# Altium PCB Plate_A.PcbDoc
Units mm, origin at the board's own origin, x right, y up, seen from the top; angles counter-clockwise.
Board outline 100 x 100 mm, 2 copper layers (Top Layer, Bottom Layer), stack 0.97 mm thick; 6 components, 2 nets, 10 pads, 0 vias.
Unrouted connection lines stored in the file: 2.
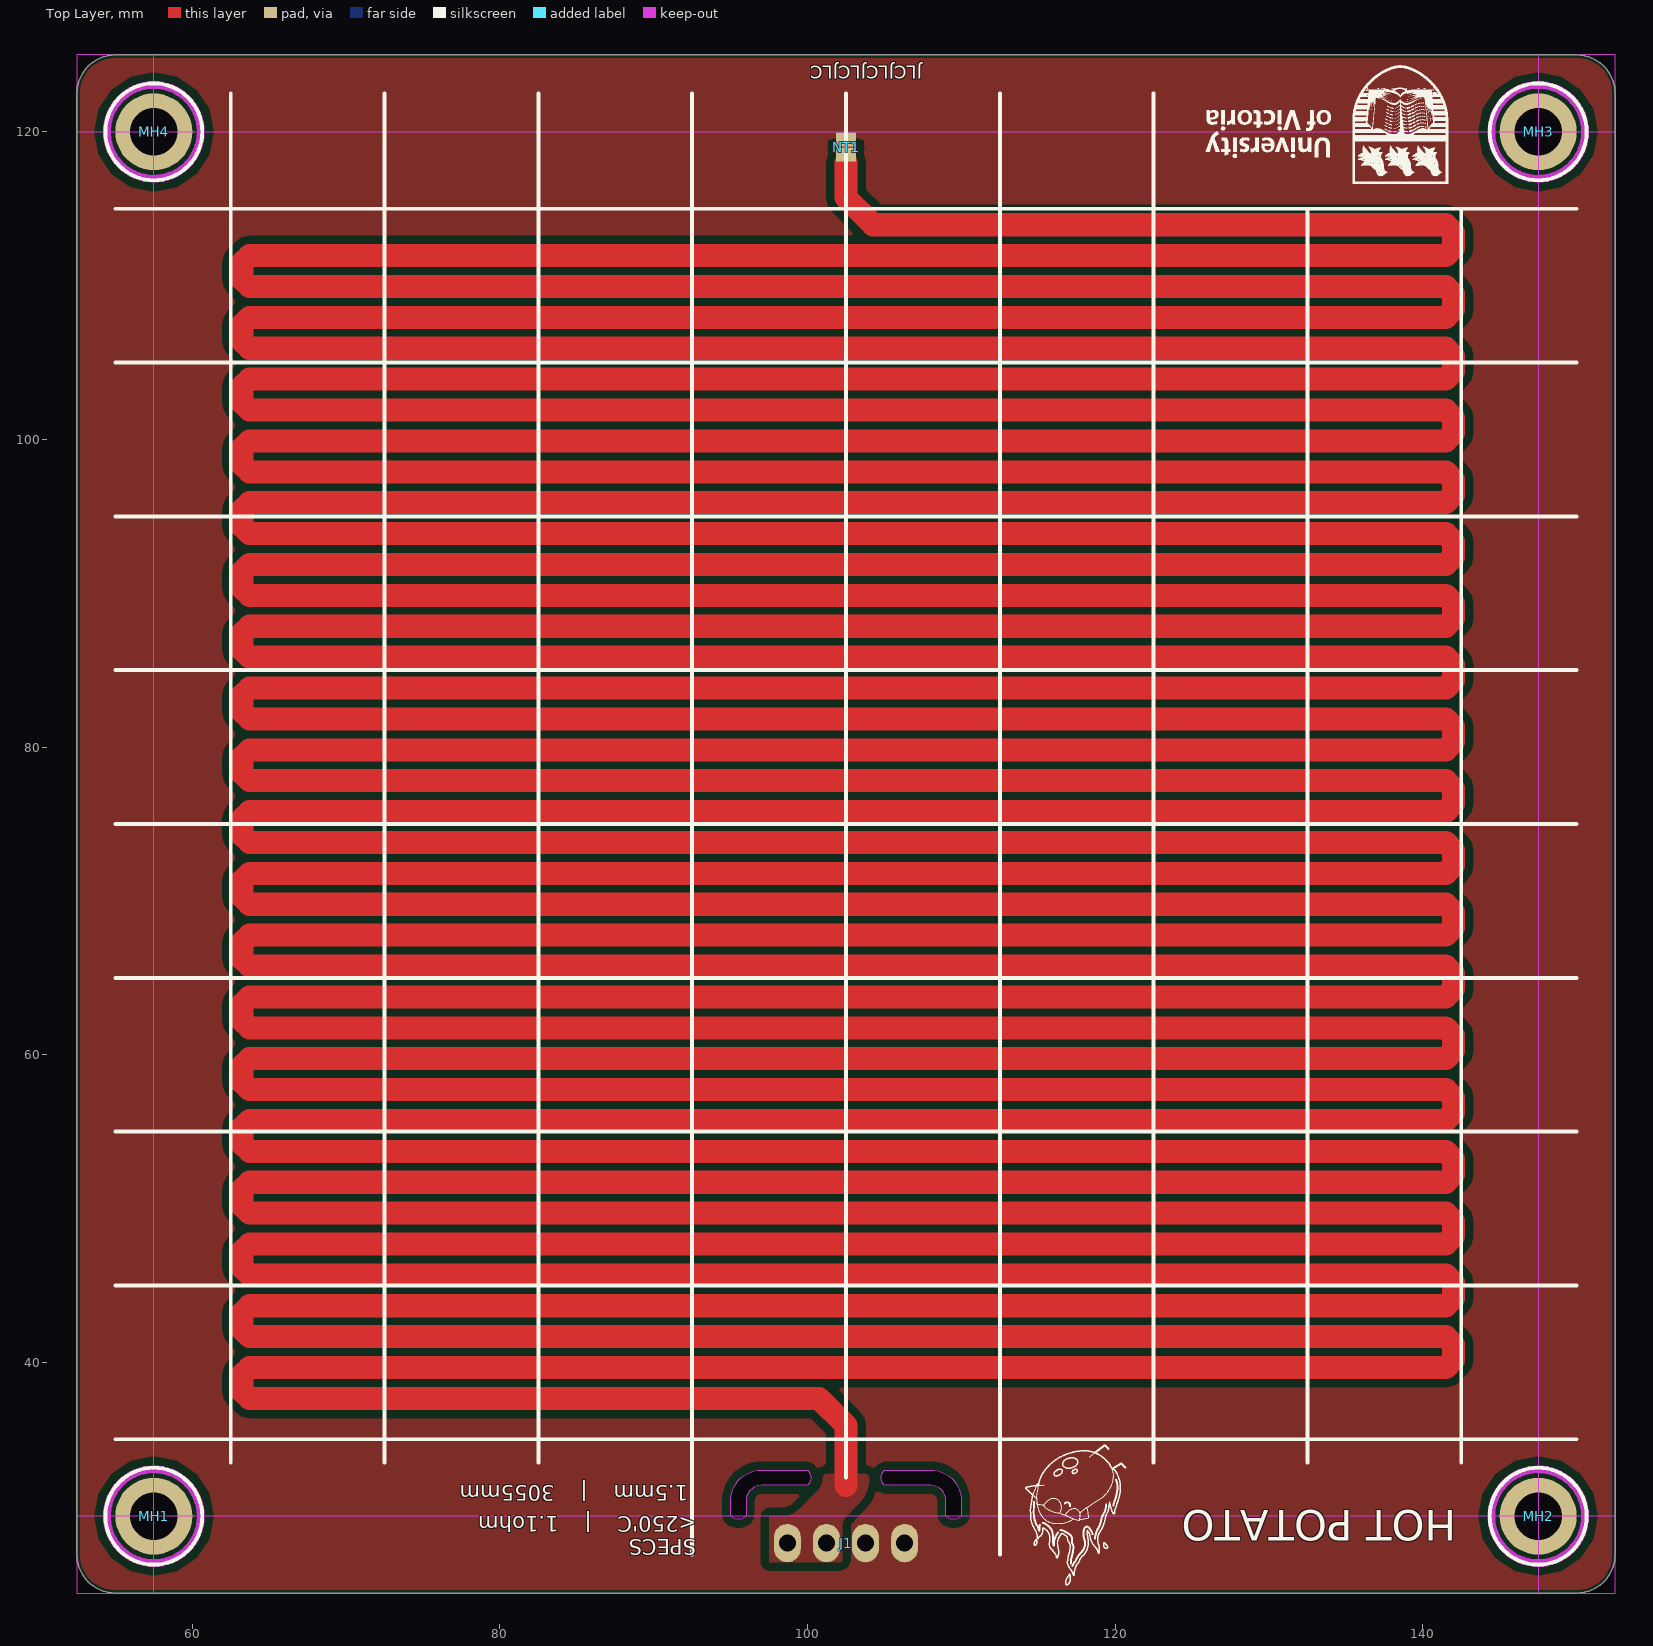
[diagram p0: Top Layer view]
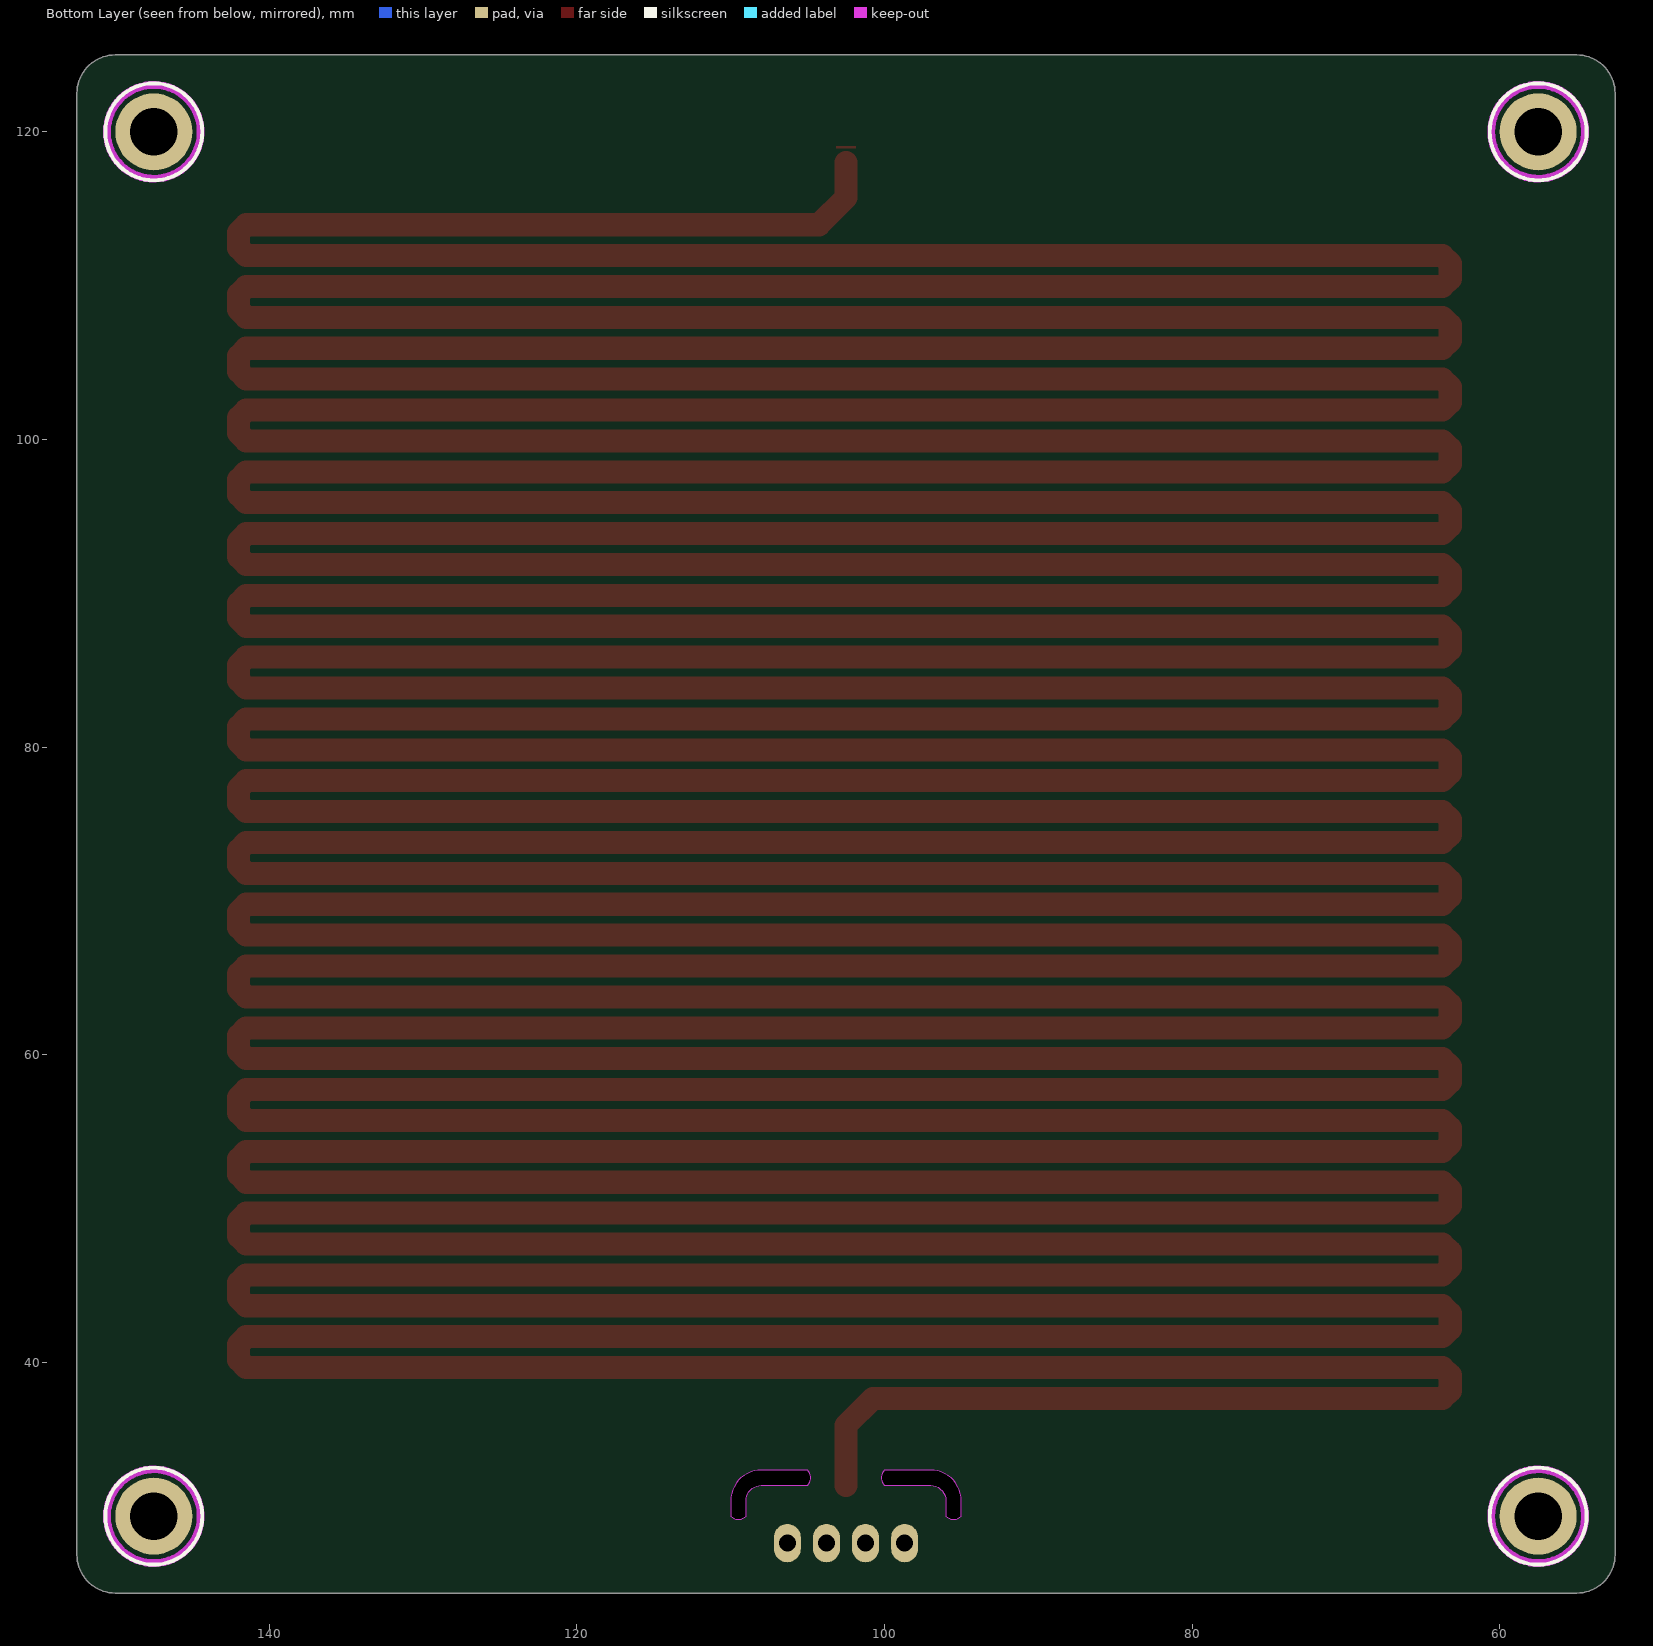
[diagram p1: Bottom Layer view, seen from below]

## Layer stack, top to bottom
Top Solder: solder mask 0.0127, Solder Resist, Dk 3.8
Top Layer: signal copper 0.035
Dielectric: core 0.9, FR-4, Dk 4.5
Bottom Layer: signal copper 0.035
Bottom Solder: solder mask 0.0127, Solder Resist, Dk 3.8

## Board outline
52.5,27.5 ccw(c55,27.5) 55,25 150,25 ccw(c150,27.5) 152.5,27.5 152.5,122.5 ccw(c150,122.5) 150,125 55,125 ccw(c55,122.5) 52.5,122.5
cut-out: 95,30 95,31 cw(c97,31) 97,33 100,33 cw(c99.5,32.5) 100,32 97,32 ccw(c97,31) 96,31 96,30 cw(c95.5,30.5)
cut-out: 105,32 cw(c105.5,32.5) 105,33 108,33 cw(c108,31) 110,31 110,30 cw(c109.5,30.5) 109,30 109,31 ccw(c108,31) 108,32

## Design rules (kind name [scope] priority, off if disabled: settings)
BoardOutlineClearance [All] p1: gap=0.2 ignorepadtopadclearanceinfootprint=FALSE
Clearance "Polygon Pour Clearance" [InPolygon] p1: gap=0.508 ignorepadtopadclearanceinfootprint=FALSE
Clearance [All] p2: gap=0.127 ignorepadtopadclearanceinfootprint=FALSE except(0.25: Arc-Hole Track-Hole SMDPad-Hole THPad-Hole Via-Hole Fill-Hole Poly-Hole Region-Hole Text-Hole)
ComponentClearance [All] p1: gap=0.127 collisioncheckmode=3 verticalgap=0.127 showdistances=TRUE
DiffPairsRouting [All] p1: maxlimit=0.254 minlimit=0.127 mostfreqgap=0.127 toplayer_minwidth=0.127 toplayer_maxwidth=25.4 toplayer_prefwidth=0.127 bottomlayer_minwidth=0.127 bottomlayer_maxwidth=25.4 bottomlayer_prefwidth=0.127 maxuncoupledlength=12.7
Height [All] p1: minheight=0 maxheight=1816.048 prefheight=12.7
HoleSize [All] p1: absolutevalues=TRUE maxlimit=6.3 minlimit=0.3 maxpercent=80.000 minpercent=20.000
HoleToHoleClearance [All] p1: gap=0.25 allowstackedmicrovias=FALSE
MinimumAnnularRing [All] p1: minimumring=0.076
MinimumSolderMaskSliver [All] p1: minsoldermaskwidth=0
PlaneClearance [All] p1: clearance=0.127
PlaneConnect PlaneConnectPowerPads [InPadClass('PowerPads')] p1: planeconnectstyle=Direct reliefexpansion=0.508 reliefentries=4 reliefconductorwidth=0.254 reliefairgap=0.254
PlaneConnect [All] p2: pad.planeconnectstyle=Relief pad.reliefexpansion=0.3 pad.reliefentries=4 pad.reliefconductorwidth=0.127 pad.reliefairgap=0.127 via.planeconnectstyle=Direct via.reliefexpansion=0.3 via.reliefentries=4 via.reliefconductorwidth=0.127 via.reliefairgap=0.127
PolygonConnect PolygonConnectPowerPads [All vs (InPadClass('PowerPads'))] p1: connectstyle=Direct reliefconductorwidth=0.254 reliefentries=4 polygonreliefangle="90 Angle" airgapwidth=0.254
PolygonConnect [All] p2: thpad.connectstyle=Relief thpad.reliefconductorwidth=0.127 thpad.reliefentries=4 thpad.polygonreliefangle="90 Angle" thpad.airgapwidth=0.127 smdpad.connectstyle=Relief smdpad.reliefconductorwidth=0.127 smdpad.reliefentries=4 smdpad.polygonreliefangle="90 Angle" smdpad.airgapwidth=0.127 via.connectstyle=Direct via.reliefconductorwidth=0.127 via.reliefentries=4 via.polygonreliefangle="90 Angle" via.airgapwidth=0.127
RoutingVias [All] p1: holewidth=0.3 width=0.6 viastyle="Through Hole" minholewidth=0.3 minwidth=0.6 maxholewidth=0.6 maxwidth=6.6
SilkToSilkClearance [All] p1: silktosilkclearance=0
SilkToSolderMaskClearance [IsPad] p1: minsilkscreentomaskgap=0.127 clearancetoexposedcopper=TRUE
SolderMaskExpansion [All] p1: expansion=0.075 istentingtop=FALSE
Width [All] p1: maxlimit=25.4 minlimit=0.127 preferedwidth=0.127 minimp=50.000000 maximp=50.000000 favimp=50.000000
20 further rules are at their usual default settings.

## Classes and differential pairs
component class plate: J1 MH1 MH2 MH3 MH4

## Components (designator, comment, footprint, x,y, rotation, side; value= is the part's Value field where it differs from the comment)
J1 "282834-4" "TE 282834-4" 102.5,28.25 r180 top
MH1 "3mm" Mount-Hole_3mm 57.5,30 r0 top locked
MH2 "3mm" Mount-Hole_3mm 147.5,30 r0 top locked
MH3 "3mm" Mount-Hole_3mm 147.5,120 r0 top locked
MH4 "3mm" Mount-Hole_3mm 57.5,120 r0 top locked
NT1 "Net Tie" NetTie_50mil 102.5,119 r270 top net-tie

## Footprints (in the part's own frame and the unit in brackets; to place one, negate y for a bottom-side part, rotate by r counter-clockwise, add the part's x,y. Pads: shape width x height; smd on the part's side, far side on the other; paste and mask are expansions set on the pad)
Mount-Hole_3mm [mm]
  round 5 hole 3.1: 1(0,0)
  Keep-Out Layer circle w0.508: c0,0 r3.048
  silkscreen extent -3.15,-3.15 3.15,3.15, body extent -2.25,-2.6 2.25,2.6, height 4.19
NetTie_50mil [mm]
  rect 0.889x1.27 smd mask+0.102: 1(-0.5,0) 2(0.5,0)
  Top Layer region: -0.075,0.635 0.075,0.635 0.075,-0.635 -0.075,-0.635
"TE 282834-4" [mm]
  oval 1.75x2.5 hole 1.1: 1(-3.81,0) 2(-1.27,0) 3(1.27,0) 4(3.81,0)
  body extent -5.31,-3.25 5.31,3.25, height 10

## Part data
J1: "TERM BLK 4P SIDE ENT 2.54MM PCB", Color=Green, Current=10A, Manufacturer="TE Connectivity AMP Connectors", Supplier Part Number 1=A98335-ND, Voltage=150V, ComponentLink1Description=Datasheet, ComponentLink1URL=https://www.te.com/commerce/DocumentDelivery/DDEController?Action=srchrtrv&DocNm=282834&DocType=Customer+Drawing&DocLang=English, ComponentLink2Description="DigiKey Link", ComponentLink2URL=http://digikey.com/product-detail/en/te-connectivity-amp-connectors/282834-4/A98335-ND/1153265, LastUpdated="2020-01-15 4:16:05 AM", Lifecycle Status=Active, Mating Orientation="Horizontal with Board", Minimum Order=1, Mounting Type="Through Hole", Number of Levels=1, Packaging=Bulk, Part Number=282834-4, Part Status=Active, Pitch="0.100\" (2.54mm)", Positions Per Level=4, Price=2.68, Series=Buchanan, Supplier 1=DigiKey, Wire Gauge="16-30 AWG", Wire Termination="Screw - Rising Cage Clamp"
MH1 MH2 MH3 MH4: library part Mount_Hole_3mm, "Mounting Hole 3mm plated"
NT1: library part NetTie_50mil, "Net Tie with 50mil trace"

## Nets (pads, with @x,y where several pads share a name; then routed paths per layer and width w, separated by ;. In a path a pad name is that pad's centre, name@x,y a point inside that pad or via, vN(x,y) a via of type N, cw(c..) or ccw(c..) an arc to the next point about the centre after c; other vN are vias at no path point)
PWR: J1.3 J1.4 NT1.2 | length 3054.9
  Top Layer w1.5: 102.5,32 102.5,34.375 102.5,35.125 102.5,35.898 100.743,37.656 63.721,37.656 63.219,38.158 63.219,39.162 63.721,39.664 141.489,39.664 141.991,40.166 141.991,41.17 141.489,41.672 63.721,41.672 63.219,42.174 63.219,43.178 63.721,43.68 141.489,43.68 141.991,44.182 141.991,45.186 141.489,45.688 63.721,45.688 63.219,46.19 63.219,47.194 63.721,47.696 141.489,47.696 141.991,48.198 141.991,49.202 141.489,49.704 63.721,49.704 63.219,50.206 63.219,51.21 63.721,51.712 141.489,51.712 141.991,52.214 141.991,53.218 141.489,53.72 63.721,53.72 63.219,54.222 63.219,55.226 63.721,55.728 141.489,55.728 141.991,56.23 141.991,57.234 141.489,57.736 63.721,57.736 63.219,58.238 63.219,59.242 63.721,59.744 141.489,59.744 141.991,60.246 141.991,61.25 141.489,61.752 63.721,61.752 63.219,62.254 63.219,63.258 63.721,63.76 141.489,63.76 141.991,64.262 141.991,65.266 141.489,65.768 63.721,65.768 63.219,66.27 63.219,67.274 63.721,67.776 141.489,67.776 141.991,68.278 141.991,69.282 141.489,69.784 63.721,69.784 63.219,70.286 63.219,71.29 63.721,71.792 141.489,71.792 141.991,72.294 141.991,73.298 141.489,73.8 63.721,73.8 63.219,74.302 63.219,75.306 63.721,75.808 141.489,75.808 141.991,76.31 141.991,77.314 141.489,77.816 63.721,77.816 63.219,78.318 63.219,79.322 63.721,79.824 141.489,79.824 141.991,80.326 141.991,81.33 141.489,81.832 63.721,81.832 63.219,82.334 63.219,83.338 63.721,83.84 141.489,83.84 141.991,84.342 141.991,85.346 141.489,85.848 63.721,85.848 63.219,86.35 63.219,87.354 63.721,87.856 141.489,87.856 141.991,88.358 141.991,89.362 141.489,89.864 63.721,89.864 63.219,90.366 63.219,91.37 63.721,91.872 141.489,91.872 141.991,92.374 141.991,93.378 141.489,93.88 63.721,93.88 63.219,94.382 63.219,95.386 63.721,95.888 141.489,95.888 141.991,96.39 141.991,97.394 141.489,97.896 63.721,97.896 63.219,98.398 63.219,99.402 63.721,99.904 141.489,99.904 141.991,100.406 141.991,101.41 141.489,101.912 63.721,101.912 63.219,102.414 63.219,103.418 63.721,103.92 141.489,103.92 141.991,104.422 141.991,105.426 141.489,105.928 63.721,105.928 63.219,106.43 63.219,107.434 63.721,107.936 141.489,107.936 141.991,108.438 141.991,109.442 141.489,109.944 63.721,109.944 63.219,110.446 63.219,111.45 63.721,111.952 141.489,111.952 141.991,112.454 141.991,113.458 141.489,113.96 104.257,113.96 102.5,115.717 102.5,116.467 102.5,118
RETURN: J1.1 J1.2 NT1.1
pads on no net: MH1.1 MH2.1 MH3.1 MH4.1

## Polygon pours and split planes (outlines as drawn)
RETURN on Top Layer "RETURN_L01_P007" (solid, pour order 7): 52.5,125 152.5,125 152.5,25 52.5,25
PWR on Top Layer "ggg" (solid, pour order 5): 101.25,32.75 103.75,32.75 cw(c103.75,32.5) 104,32.5 cw(c101.497,32.499) 103.266,30.728 102.473,29.936 ccw(c103.013,29.396) 102.25,29.396 102.25,27 97.5,27 97.5,30 98.293,30 ccw(c98.293,31.707) 99.5,30.5 100.646,31.646 ccw(c99.793,32.5) 101,32.5 cw(c101.25,32.5)

## Keep-outs
Top Layer:
  region: 52.5,120 152.5,120 152.5,125 52.5,125
  region: 52.5,25 152.5,25 152.5,30 52.5,30
  region: 147.5,125 147.5,25 152.5,25 152.5,125
  region: 52.5,125 52.5,25 57.5,25 57.5,125

## Silkscreen, mask and mechanical layers (free items; w line width, h text height)
Top Overlay:
  drawing of 192 lines, arcs and shapes, not listed
  text "JLCJLCJLCJLC" at 107.457,124.3 h0.85 r180
  text "1.5mm    |    3055mm" at 92.25,32 h1 r180
  text "HOT POTATO" at 142.164,30.4 h2 r180
  text "SPECS / <250'C    |    1.1ohm" at 92.75,30 h1 r180
Dimensions:
  lines w0.254: 52.5,75 152.5,75 ; 102.5,25 102.5,125 ; 152.5,25 52.5,125 ; 52.5,25 152.5,125 ; 52.5,25 52.5,25 ; 52.5,125 52.5,125 ; 52.5,125 52.5,125 ; 152.5,125 152.5,125
Board:
  lines w0.254: 52.5,27.5 ccw(c55,27.5) 55,25 150,25 ccw(c150,27.5) 152.5,27.5 152.5,122.5 ccw(c150,122.5) 150,125 55,125 ccw(c55,122.5) 52.5,122.5 52.5,27.5 ; 95,30 ccw(c95.5,30.5) 96,30 96,31 cw(c97,31) 97,32 100,32 ccw(c99.5,32.5) 100,33 97,33 ccw(c97,31) 95,31 95,30 ; 105,32 cw(c105.5,32.5) 105,33 108,33 cw(c108,31) 110,31 110,30 cw(c109.5,30.5) 109,30 109,31 ccw(c108,31) 108,32 105,32
Formula:
  text "Setting Trace Length and Width: /  Trace Length: PCB panel -> NET name PWR -> \"Routed Length\" /                Adj: Select Hotplate traces -> Tweak \"Space\" /  Trace Width: Select Base or tale of track -> properties -> \"Width\" /                Adj: Select Hotplate Traces -> *DELETE* -> Change Width -> \"Interactively tune Trace Length:" at 160,122.5 h1.52

## Dimensions
57.5,30 to 57.5,120 on Dimensions
57.5,120 to 147.5,120 on Dimensions
55,105 to 55,115 on Top Overlay
62.5,122.5 to 72.5,122.5 on Top Overlay
57.5,120 to 55,125 on Dimensions
57.5,120 to 52.5,122.5 on Dimensions
52.5,25 to 52.5,125 on Dimensions
52.5,125 to 152.5,125 on Dimensions